# EAGLE board Quad-4layer (EAGLE 9.5.1)
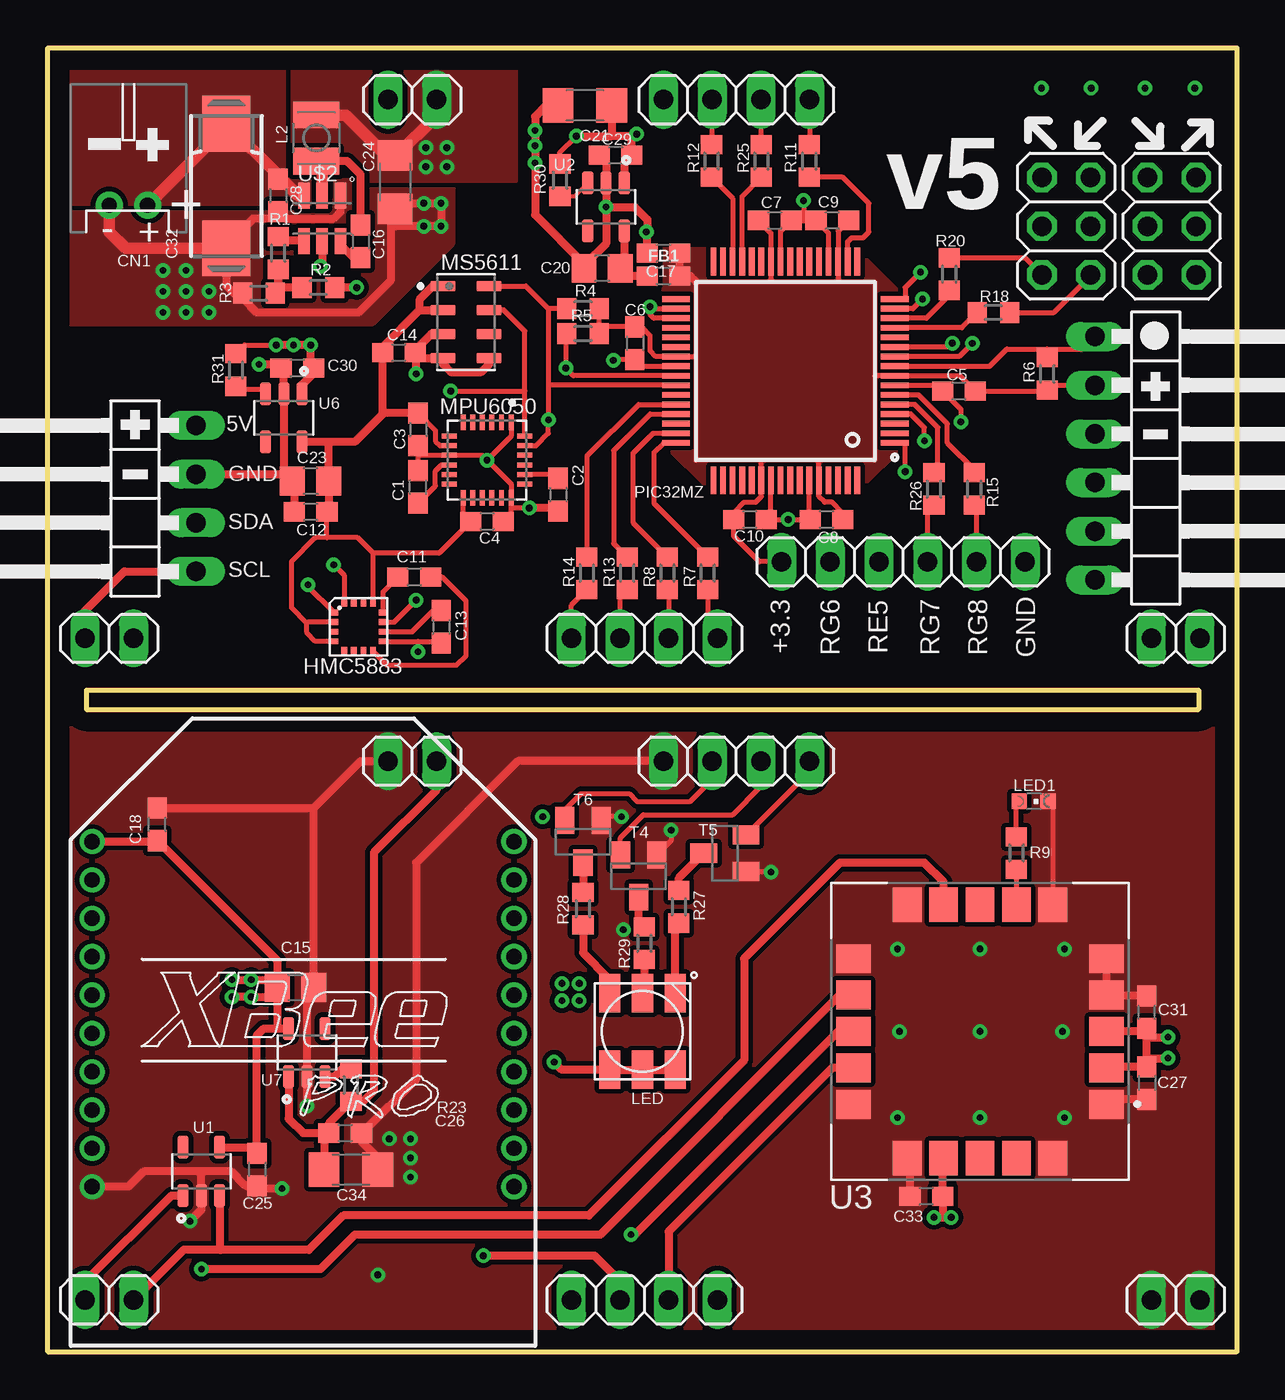
[diagram p0: board, top side]
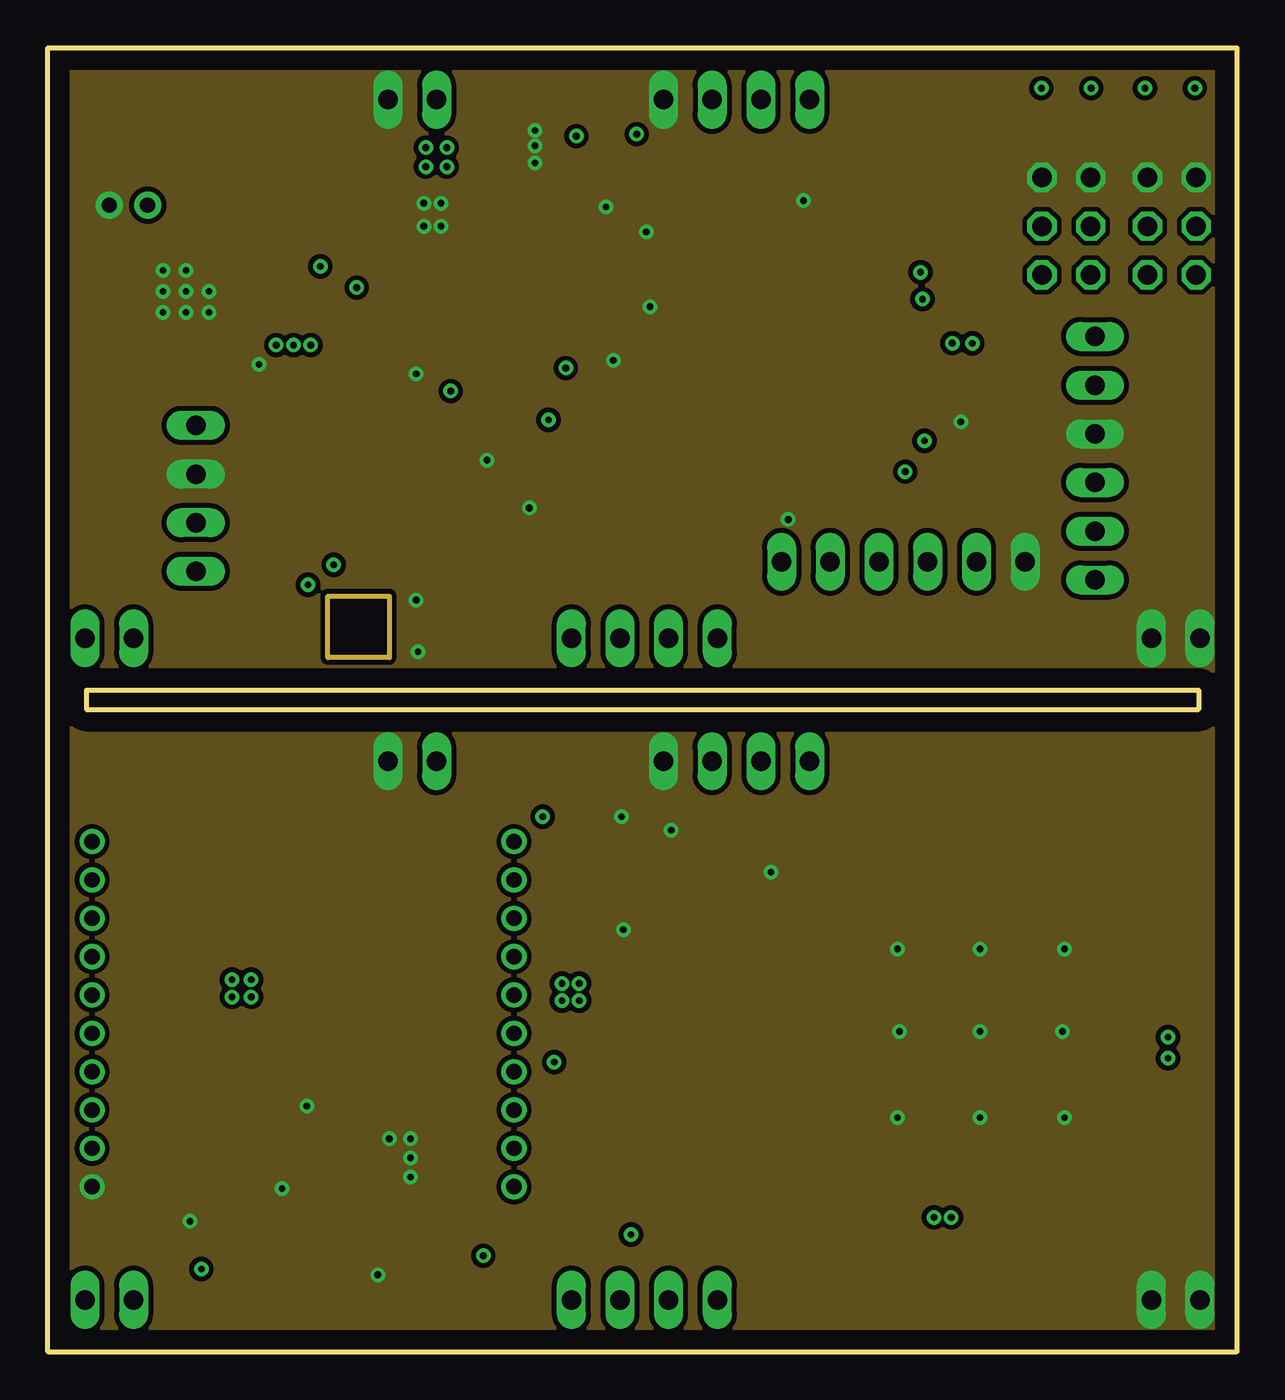
[diagram p1: board, inner layer GND]
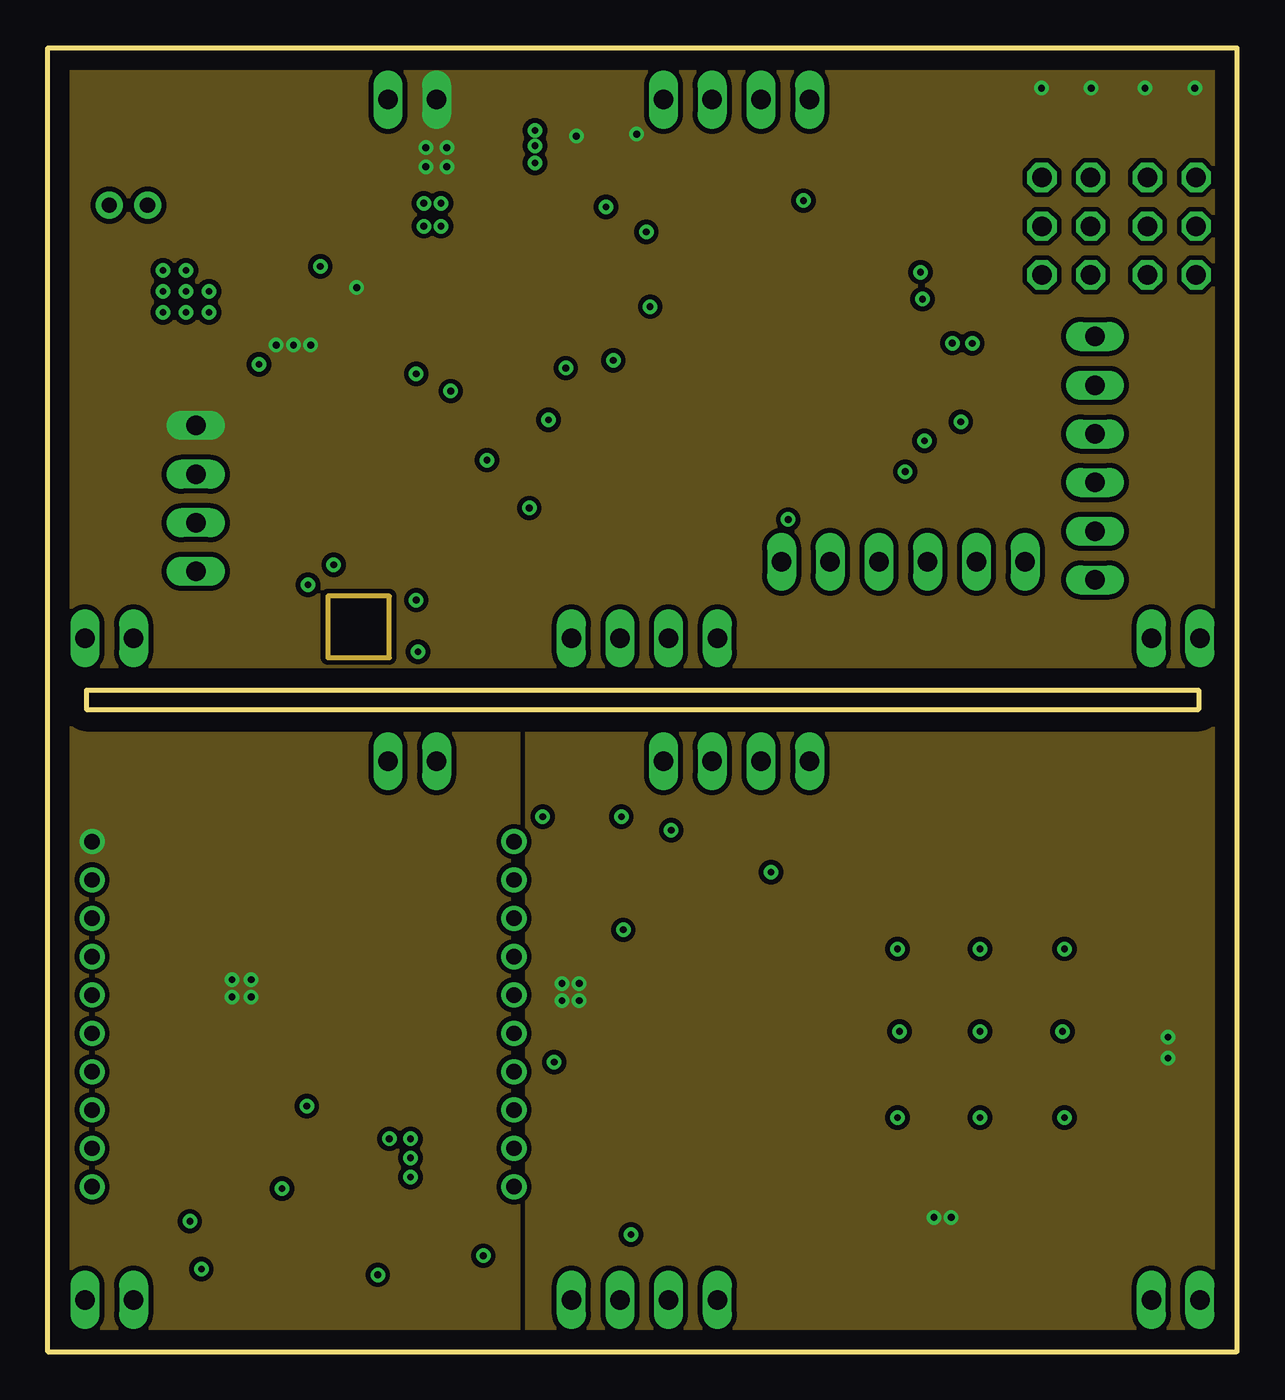
[diagram p2: board, inner layer VDD]
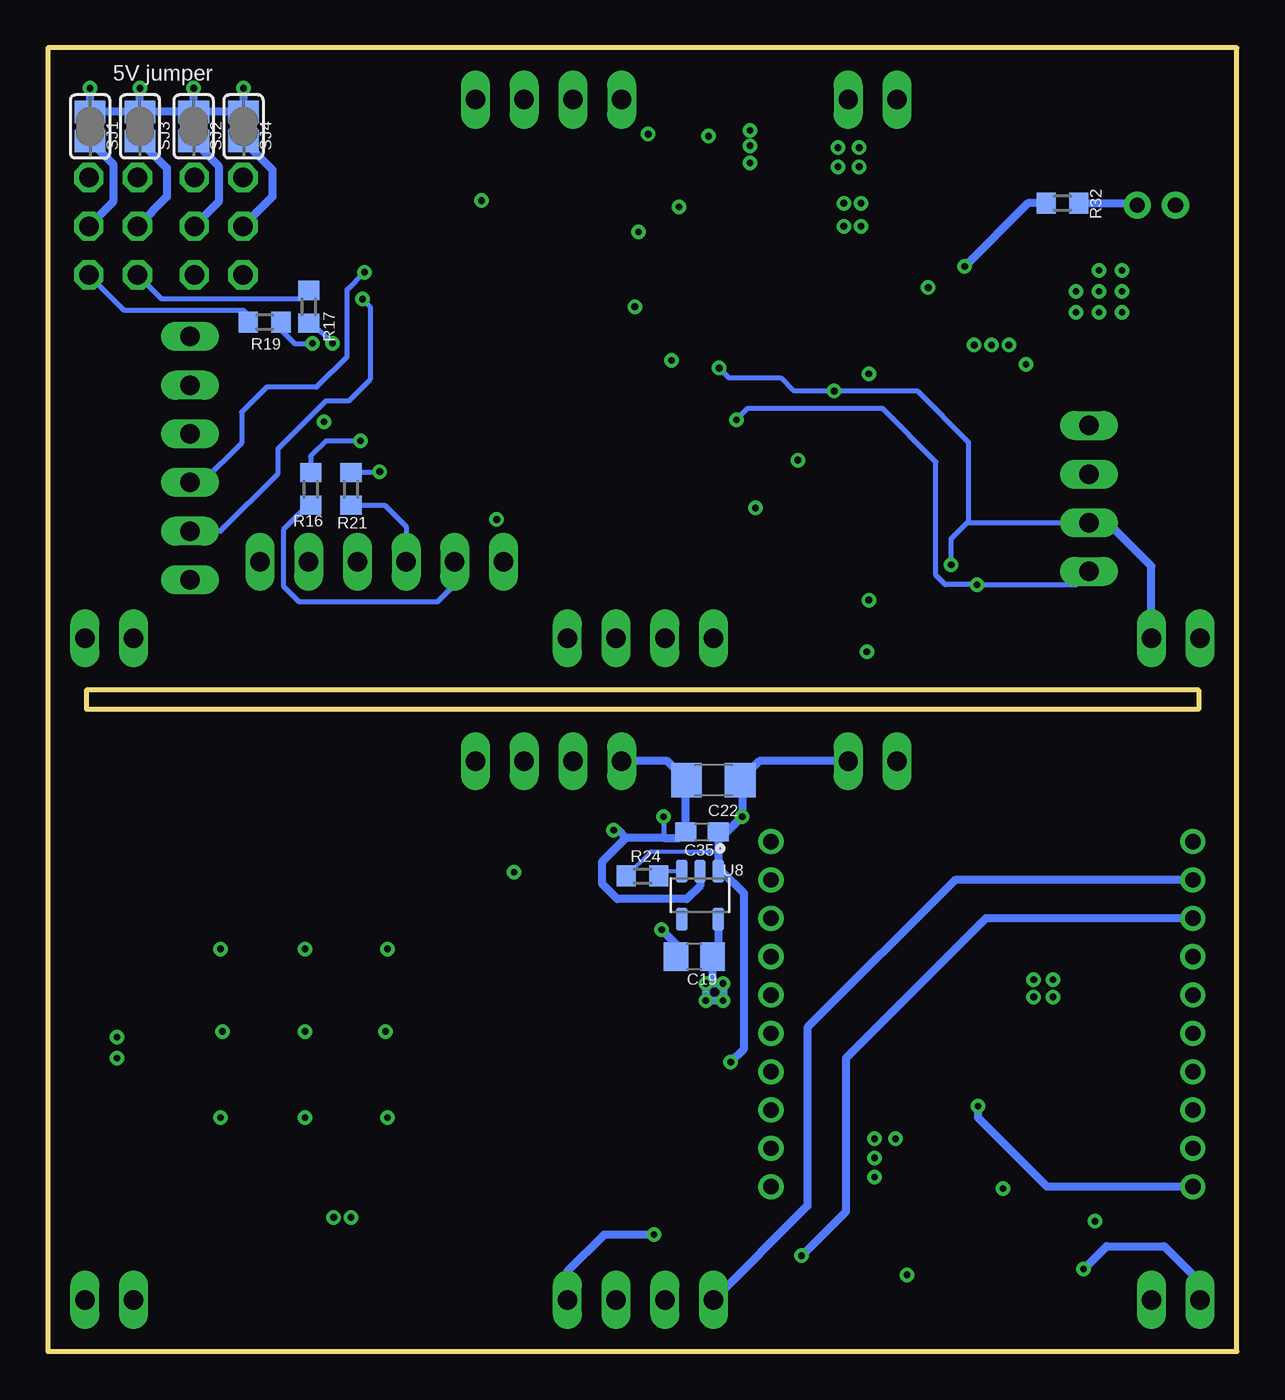
[diagram p3: board, bottom side, seen from below]

Size 62 x 68 mm. Coordinates in mm from the lower left corner, seen from the top.
Outline: 0,0 0,68 62,68 62,0 0,0
Outline: 2,34.5 60,34.5 60,33.5 2,33.5 2,34.5
Copper layers (1*2+15*16): Top 0.035mm / dielectric 0.2mm / GND 0.0175mm / dielectric 1.065mm / VDD 0.0175mm / dielectric 0.2mm / Bottom 0.035mm
Design rules "default *": minimum track width 6mil, minimum drill 0.35mm, track to track 6mil, track to pad 6mil, pad to pad 6mil, via to via 6mil, smd to smd 6mil, copper to edge 40mil, drill to drill 6mil, minimum pad ring 10mil, minimum via ring 8mil, stop-mask expansion 4mil, vias tented up to drill 0mil, thermal gap 10mil

## Footprints (pad centres in the part's own frame; a part is rotated, then mirrored left to right if it is on the bottom)
C0603 = smd 1.1 x 1: 1 -0.85,0; 2 0.85,0
C0805 = smd 1.3 x 1.5: 1 -0.95,0; 2 0.95,0
C1206 = smd 1.6 x 1.8: 1 -1.4,0; 2 1.4,0
085CS_1AR = smd 2.9 x 2.5: + 3.25,0; - -3.25,0
JST-PH-2-THM-RA = drill 0.8 pad 1.422: 1 1,0; 2 -1,0
0603 = smd 1.1 x 1: 1 -0.85,0; 2 0.85,0
LPCC-16 = smd 0.45 x 0.3: 1 -1.275,0.75; 2 -1.275,0.25; 3 -1.275,-0.25; 4 -1.275,-0.75; 9 1.275,-0.75; 10 1.275,-0.25; 11 1.275,0.25; 12 1.275,0.75 | smd 0.3 x 0.45: 5 -0.75,-1.275; 6 -0.25,-1.275; 7 0.25,-1.275; 8 0.75,-1.275; 13 0.75,1.275; 14 0.25,1.275; 15 -0.25,1.275; 16 -0.75,1.275
1X04 = drill 1.016 long: 1 -3.81,0; 2 -1.27,0; 3 1.27,0; 4 3.81,0
1X02 = drill 1.016 long: 1 -1.27,0; 2 1.27,0
1X06/90 = drill 1.016 long: 1 -6.35,-3.81; 2 -3.81,-3.81; 3 -1.27,-3.81; 4 1.27,-3.81; 5 3.81,-3.81; 6 6.35,-3.81
2X03 = drill 1.016 octagon: 1 -2.54,-1.27; 2 -2.54,1.27; 3 0,-1.27; 4 0,1.27; 5 2.54,-1.27; 6 2.54,1.27
1X06 = drill 1.016 long: 1 -6.35,0; 2 -3.81,0; 3 -1.27,0; 4 1.27,0; 5 3.81,0; 6 6.35,0
1X04/90 = drill 1.016 long: 1 -3.81,-3.81; 2 -1.27,-3.81; 3 1.27,-3.81; 4 3.81,-3.81
L2825P = smd 1.4 x 2.4: 1 -1.2,0; 2 1.2,0
RGBLED5050 = smd 2 x 1.1: 1 -2,1.7; 2 -2,0; 3 -2,-1.7; 4 2,-1.7; 5 2,0; 6 2,1.7
CHIPLED_0603 = smd 0.8 x 0.8: A 0,-0.75; C 0,0.75
QFN50P400X400X95-24N = smd 0.79 x 0.26: 1 -1.97,1.25; 2 -1.97,0.75; 3 -1.97,0.25; 4 -1.97,-0.25; 5 -1.97,-0.75; 6 -1.97,-1.25; 13 1.97,-1.25; 14 1.97,-0.75; 15 1.97,-0.25; 16 1.97,0.25; 17 1.97,0.75; 18 1.97,1.25 | smd 0.26 x 0.79: 7 -1.25,-1.97; 8 -0.75,-1.97; 9 -0.25,-1.97; 10 0.25,-1.97; 11 0.75,-1.97; 12 1.25,-1.97; 19 1.25,1.97; 20 0.75,1.97; 21 0.25,1.97; 22 -0.25,1.97; 23 -0.75,1.97; 24 -1.25,1.97
SON125P500X300X100-8N = smd 1.31 x 0.53: 1 -1.2,1.875; 2 -1.2,0.625; 3 -1.2,-0.625; 4 -1.2,-1.875; 5 1.2,-1.875; 6 1.2,-0.625; 7 1.2,0.625; 8 1.2,1.875
QFP50P1200X1200X120-64N = smd 1.45 x 0.3: 1 -5.7,3.75; 2 -5.7,3.25; 3 -5.7,2.75; 4 -5.7,2.25; 5 -5.7,1.75; 6 -5.7,1.25; 7 -5.7,0.75; 8 -5.7,0.25; 9 -5.7,-0.25; 10 -5.7,-0.75; 11 -5.7,-1.25; 12 -5.7,-1.75; 13 -5.7,-2.25; 14 -5.7,-2.75; 15 -5.7,-3.25; 16 -5.7,-3.75; 33 5.7,-3.75; 34 5.7,-3.25; 35 5.7,-2.75; 36 5.7,-2.25; 37 5.7,-1.75; 38 5.7,-1.25; 39 5.7,-0.75; 40 5.7,-0.25; 41 5.7,0.25; 42 5.7,0.75; 43 5.7,1.25; 44 5.7,1.75; 45 5.7,2.25; 46 5.7,2.75; 47 5.7,3.25; 48 5.7,3.75 | smd 0.3 x 1.45: 17 -3.75,-5.7; 18 -3.25,-5.7; 19 -2.75,-5.7; 20 -2.25,-5.7; 21 -1.75,-5.7; 22 -1.25,-5.7; 23 -0.75,-5.7; 24 -0.25,-5.7; 25 0.25,-5.7; 26 0.75,-5.7; 27 1.25,-5.7; 28 1.75,-5.7; 29 2.25,-5.7; 30 2.75,-5.7; 31 3.25,-5.7; 32 3.75,-5.7; 49 3.75,5.7; 50 3.25,5.7; 51 2.75,5.7; 52 2.25,5.7; 53 1.75,5.7; 54 1.25,5.7; 55 0.75,5.7; 56 0.25,5.7; 57 -0.25,5.7; 58 -0.75,5.7; 59 -1.25,5.7; 60 -1.75,5.7; 61 -2.25,5.7; 62 -2.75,5.7; 63 -3.25,5.7; 64 -3.75,5.7
R0603 = smd 1 x 1.1: 1 -0.85,0; 2 0.85,0
SJ = smd 1.168 x 1.6: 1 -0.762,0; 2 0.762,0
SOT23-EBC = smd 1 x 1.4: B 0.95,-1.1; C 0,1.1; E -0.95,-1.1
SOT95P280X145-5N = smd 1.21 x 0.59: 1 -1.255,0.95; 2 -1.255,0; 3 -1.255,-0.95; 4 1.255,-0.95; 5 1.255,0.95
XCVR_SAM-M8Q = smd 1.8 x 1.5: 1 -6.6,3.8; 2 -6.6,1.9; 3 -6.6,0; 4 -6.6,-1.9; 5 -6.6,-3.8; 11 6.6,-3.8; 12 6.6,-1.9; 13 6.6,0; 14 6.6,1.9; 15 6.6,3.8 | smd 1.5 x 1.8: 6 -3.8,-6.6; 7 -1.9,-6.6; 8 0,-6.6; 9 1.9,-6.6; 10 3.8,-6.6; 16 3.8,6.6; 17 1.9,6.6; 18 0,6.6; 19 -1.9,6.6; 20 -3.8,6.6
SOT95P280X140-6N = smd 1.35 x 0.6: 1 -1.185,0.95; 2 -1.185,0; 3 -1.185,-0.95; 4 1.185,-0.95; 5 1.185,0; 6 1.185,0.95
XBEE-PRO = drill 0.8 pad 1.27: 1 -11,9; 2 -11,7; 3 -11,5; 4 -11,3; 5 -11,1; 6 -11,-1; 7 -11,-3; 8 -11,-5; 9 -11,-7; 10 -11,-9; 11 11,-9; 12 11,-7; 13 11,-5; 14 11,-3; 15 11,-1; 16 11,1; 17 11,3; 18 11,5; 19 11,7; 20 11,9

## Placement (x,y rotation side)
C1  0.1uF  [C0603]  19.3,45.1 90 top
C2  2.2nF  [C0603]  26.6,44.7 270 top
C3  10nF  [C0603]  19.3,48.1 270 top
C4  0.1uF  [C0603]  22.9,43.3 0 top
C5  0.1uF  [C0603]  47.5,50.1 180 top
C6  0.1uF  [C0603]  30.6,52.6 270 top
C7  0.1uF  [C0603]  37.9,59 0 top
C8  0.1uF  [C0603]  40.6,43.4 180 top
C9  0.1uF  [C0603]  40.9,59 180 top
C10  0.1uF  [C0603]  36.6,43.4 0 top
C11  0.22uF  [C0603]  19.1,40.4 180 top
C12  0.1uF  [C0603]  13.7,43.8 180 top
C13  4.7uF  [C0603]  20.5,37.8 270 top
C14  0.1uF  [C0603]  18.3,52.1 0 top
C15  1uF  [C0805]  12.9,19 0 top
C16  0.1uF  [C0603]  16.3,57.9 270 top
C17  0.1uF  [C0603]  32.1,57.3 180 top
C18  0.1uF  [C0603]  5.7,27.5 90 top
C19  1uF  [C0805]  28.3,20.6 180 bottom
C20  1uF  [C0805]  28.9,56.5 180 top
C21  10uF  [C1206]  28,65 180 top
C22  10uF  [C1206]  27.3,29.8 180 bottom
C23  1uF  [C0805]  13.7,45.4 180 top
C24  10uF  [C1206]  18.1,61 270 top
C25  0.1uF  [C0603]  10.9,9.5 270 top
C26  0.1uF  [C0603]  15.5,11.4 0 top
C27  0.1uF  [C0603]  57.3,14 270 top
C28  0.1uF  [C0603]  12,60.3 270 top
C29  0.1uF  [C0603]  29.6,62.4 180 top
C30  0.1uF  [C0603]  13,51.3 180 top
C31  0.1uF  [C0603]  57.3,17.7 90 top
C32  [085CS_1AR]  9.3,60.8 90 top
C33  0.1uF  [C0603]  45.8,8.1 180 top
C34  10uF  [C1206]  15.8,9.5 0 top
C35  0.1uF  [C0603]  27.9,27.1 180 bottom
CN1  [JST-PH-2-THM-RA]  4.2,59.8 0 top
FB1  30Ω/1.8A  [0603]  32.1,56.1 0 top
HMC5883  HMC5883L  [LPCC-16]  16.2,37.8 0 top
JP1  [1X04]  31.1,2.7 0 top
JP2  [1X02]  3.2,37.2 180 top
JP3  [1X06/90]  58.4,46.6 270 top
JP4  [2X03]  53.1,58.7 90 top
JP5  [2X03]  58.6,58.7 90 top
JP8  [1X04]  35.9,30.8 180 top
JP9  [1X04]  35.9,65.3 180 top
JP10  [1X02]  19,65.3 180 top
JP11  [1X04]  31.1,37.2 0 top
JP12  [1X02]  3.2,2.7 180 top
JP13  [1X02]  19,30.8 180 top
JP14  [1X02]  58.8,2.7 0 top
JP15  [1X02]  58.8,37.2 0 top
JP16  [1X06]  44.6,41.2 180 top
JP17  [1X04/90]  3.9,44.5 90 top
L2  4.7uH  [L2825P]  14,63.3 270 top
LED  RGBLED5050  [RGBLED5050]  31,16.7 90 top
LED1  [CHIPLED_0603]  51.4,28.7 270 top
MPU6050  MPU-6050  [QFN50P400X400X95-24N]  22.9,46.5 270 top
MS5611  MS561101BA03-50  [SON125P500X300X100-8N]  21.8,53.7 0 top
PIC32MZ  PIC32MZ2048EFH064-I/PT  [QFP50P1200X1200X120-64N]  38.45,51.15 180 top
R1  75k  [R0603]  12,57.3 270 top
R2  41k  [R0603]  14.1,55.5 0 top
R3  7.6k  [R0603]  11,55.2 0 top
R4  4.7k  [R0603]  27.9,54.4 0 top
R5  4.7k  [R0603]  27.9,53.1 0 top
R6  1k  [R0603]  52.1,51 270 top
R7  33  [R0603]  34.4,40.6 90 top
R8  33  [R0603]  32.3,40.6 90 top
R9  1k  [R0603]  50.5,26 270 top
R11  33  [R0603]  39.7,62.1 90 top
R12  33  [R0603]  34.6,62.1 90 top
R13  33  [R0603]  30.2,40.6 90 top
R14  33  [R0603]  28.1,40.6 90 top
R15  33  [R0603]  48.3,45 270 top
R16  33  [R0603]  48.3,45 270 bottom
R17  33  [R0603]  48.4,54.5 90 bottom
R18  33  [R0603]  49.3,54.2 0 top
R19  33  [R0603]  50.7,53.7 180 bottom
R20  33  [R0603]  47,56.2 90 top
R21  33  [R0603]  46.2,45 270 bottom
R23  10k  [R0603]  15.8,13.9 270 top
R24  10k  [R0603]  31,24.8 180 bottom
R25  33  [R0603]  37.2,62.1 90 top
R26  33  [R0603]  46.2,45 270 top
R27  330  [R0603]  32.9,23.2 270 top
R28  330  [R0603]  27.9,23.1 270 top
R29  220  [R0603]  31.1,21.3 270 top
R30  10k  [R0603]  26.7,61.1 90 top
R31  10k  [R0603]  9.8,51.2 90 top
R32  10k  [R0603]  9.1,59.9 0 bottom
SJ1  [SJ]  59.8,63.9 90 bottom
SJ2  [SJ]  54.4,63.9 90 bottom
SJ3  [SJ]  57.2,63.9 90 bottom
SJ4  [SJ]  51.8,63.9 90 bottom
T4  [SOT23-EBC]  30.8,24.8 180 top
T5  [SOT23-EBC]  35.3,26 90 top
T6  [SOT23-EBC]  27.9,26.6 180 top
U1  CAT24C02  [SOT95P280X145-5N]  8,9.4 90 top
U2  TLV75533PDBVR  [SOT95P280X145-5N]  29.1,59.7 270 top
U3  SAM-M8Q  [XCVR_SAM-M8Q]  48.6,16.7 180 top
U6  TLV75533PDBVR  [SOT95P280X145-5N]  12.3,48.7 270 top
U7  TLV75533PDBVR  [SOT95P280X145-5N]  13.5,15.6 90 top
U8  TLV75533PDBVR  [SOT95P280X145-5N]  28,23.8 270 bottom
U$2  AP65211A  [SOT95P280X140-6N]  14.3,59.1 270 top
XB2  XBEE-PRO  [XBEE-PRO]  13.3,17.6 0 top

## Library data of the parts
C1-C35 = rcl; SPICEPREFIX: C
CN1 LED LED1 = adafruit
FB1 = SparkFun-Coils; PROD_ID: NDUC-07859
HMC5883 = HMC5883L; AVAILABILITY: Unavailable; DESCRIPTION: Digital Compass +/- 0.8g, Lcc-16; MF: Honeywell Aerospace; MP: HMC5883L-T; PACKAGE: LCC-16 Honeywell; PRICE: None
JP1-JP5 JP8-JP17 = pinhead
L2 = rcl; SPICEPREFIX: L
MPU6050 = MPU-6050; AVAILABILITY: Unavailable; DESCRIPTION: 3-axis gyroscope, 3-axis accelerometer in a 4x4x0.9 housing; MF: TDK InvenSense; MP: MPU-6050; PACKAGE: QFN-24 InvenSense; PRICE: None
MS5611 = MS561101BA03-50; AVAILABILITY: Unavailable; DESCRIPTION: Pressure Sensor 1.44V to 3.6V 0.01bar to 1.2bar Absolute 8-Pin QFN T/R; MF: TE Connectivity; MP: MS561101BA03-50; PACKAGE: SMD-8 Measurement Specialties; PRICE: None
PIC32MZ = PIC32MZ2048EFH064-I_PT; DESCRIPTION: PIC32MZ Series 2 MB Flash 512 kB RAM 200 MHz 32-Bit Microcontroller - TQFP-64; DIGI-KEY_PART_NUMBER: PIC32MZ2048EFH064-I/PT-ND; DIGI-KEY_PURCHASE_URL: https://www.digikey.com/product-detail/en/microchip-technology/PIC32MZ2048EFH064-I-PT/PIC32MZ2048EFH064-I-PT-ND/5323563?utm_source=snapeda&utm_medium=aggregator&utm_campaign=symbol; MF: Microchip; MP: PIC32MZ2048EFH064-I/PT; PACKAGE: TQFP-64 Microchip
R1-R9 R11-R21 R23-R32 = rcl; SPICEPREFIX: R
SJ1-SJ4 = jumper
T4-T6 = transistor
U1 = CAT24C02; AVAILABILITY: Unavailable; DESCRIPTION: 500mA Low-IQ Small-Size Low-Dropout _LDO_ Regulator 5-SOT-23 -40 to 125; MF: Texas Instruments; MP: TLV75533PDBVR; PACKAGE: SOT-23 Texas Instruments; PRICE: None
U2 U6-U8 = TLV75533PDBVR; AVAILABILITY: Unavailable; DESCRIPTION: 500mA Low-IQ Small-Size Low-Dropout _LDO_ Regulator 5-SOT-23 -40 to 125; MF: Texas Instruments; MP: TLV75533PDBVR; PACKAGE: SOT-23 Texas Instruments; PRICE: None
U3 = SAM-M8Q; AVAILABILITY: Unavailable; DESCRIPTION: u-Blox M8 Gnss Antenna Module; MF: U-Blox America; MP: SAM-M8Q; PACKAGE: SMD-20 U-Blox America; PRICE: None
U$2 = SOT95P280X140-6N
XB2 = maxstream; MPN: XBP24-AWI-001; OC_FARNELL: 1337916; OC_NEWARK: 42M2667

## Nets
+3V3: C5.1 C6.1 C7.1 C8.1 C9.1 C10.1 C17.1 FB1.2 JP3.2 JP16.6 PIC32MZ.8 PIC32MZ.19 PIC32MZ.26 PIC32MZ.39 PIC32MZ.54 PIC32MZ.60 R4.2 R5.2 R6.2
+5V: C21.1 C24.1 C29.1 C30.1 JP10.1 JP17.4 L2.1 R2.2 R30.2 R31.2 SJ1.2 SJ2.2 SJ3.2 SJ4.2 U2.1 U6.1
+5V/1: C22.1 C26.1 C34.1 C35.1 JP13.1 LED.1 LED.2 LED.3 R23.2 R24.2 U7.1 U8.1
+12V: C28.1 C32.+ CN1.1 R32.2 U$2.3
DGND: C15.2 C18.2 C19.2 C22.2 C25.2 C26.2 C27.2 C31.2 C33.2 C34.2 C35.2 JP8.4 JP13.2 JP14.1 JP14.2 LED1.C T4.E T5.E T6.E U1.2 U3.1 U3.4 U3.5 U3.6 U3.10 U3.11 U3.15 U3.16 U3.20 U7.2 U8.2 XB2.10
ESC_1: JP5.1 R19.2
ESC_2: JP5.2 R17.2
ESC_3: JP4.1 R18.2
ESC_4: JP4.2 R20.2
GND: C1.2 C2.2 C3.2 C4.2 C5.2 C6.2 C7.2 C8.2 C9.2 C10.2 C12.2 C13.2 C14.2 C17.2 C20.2 C21.2 C23.2 C24.2 C28.2 C29.2 C30.2 C32.- CN1.2 HMC5883.9 HMC5883.11 JP3.3 JP4.5 JP4.6 JP5.5 JP5.6 JP9.4 JP10.2 JP15.1 JP15.2 JP16.1 JP17.3 MPU6050.1 MPU6050.9 MPU6050.18 MS5611.3 MS5611.4 MS5611.5 PIC32MZ.7 PIC32MZ.20 PIC32MZ.25 PIC32MZ.34 PIC32MZ.35 PIC32MZ.40 PIC32MZ.55 PIC32MZ.59 R3.1 U2.2 U6.2 U$2.1
GPIO1: JP16.5 R16.2
GPIO2: JP16.4 R21.2
GPIO3: JP16.3 R26.2
GPIO4: JP16.2 R15.2
GPS_RX: JP11.1 R14.1
GPS_RX_J: JP1.3 U3.14
GPS_TX: JP11.2 R13.1
GPS_TX_J: JP1.4 U3.13
LED_BLUE: JP9.1 R11.2
LED_BLUE1: JP8.1 T5.B
LED_GREEN: JP9.3 R12.2
LED_GREEN1: JP8.2 T4.B
LED_RED: JP9.2 R25.2
MCLR: JP3.1 PIC32MZ.9 R6.1
N$1: C1.1 MPU6050.10
N$2: C2.1 MPU6050.20
N$3: C11.1 HMC5883.8
N$4: C11.2 HMC5883.12
N$5: LED.5 R29.2
N$6: C13.1 HMC5883.10
N$7: LED.6 R28.2
N$8: C16.1 L2.2 U$2.2
N$9: C16.2 U$2.6
N$10: R1.1 U$2.4
N$11: R1.2 R2.1 R3.2
N$12: PIC32MZ.48 R7.2
N$13: PIC32MZ.47 R8.2
N$14: R9.2 U3.7
N$15: LED.4 R27.2
N$16: LED1.A R9.1
N$17: PIC32MZ.18 R11.1
N$18: PIC32MZ.45 R13.2
N$19: PIC32MZ.44 R14.2
N$20: PIC32MZ.29 R25.1
N$21: PIC32MZ.4 R16.1
N$22: PIC32MZ.1 R21.1
N$23: PIC32MZ.11 R17.1
N$24: PIC32MZ.13 R18.1
N$25: PIC32MZ.10 R19.1
N$26: PIC32MZ.14 R20.1
N$27: R23.1 U7.3
N$28: R24.1 U8.3
N$29: JP4.4 SJ4.1
N$30: PIC32MZ.5 R26.1
N$31: PIC32MZ.6 R15.1
N$32: R31.1 U6.3
N$33: R30.1 U2.3
N$34: PIC32MZ.30 R12.1
N$35: JP8.3 T6.B
N$36: R32.1 U$2.5
N$39: C20.1 FB1.1 U2.5
N$40: JP5.3 SJ1.1
N$41: JP4.3 SJ2.1
N$42: R28.1 T6.C
N$43: R29.1 T4.C
N$44: R27.1 T5.C
N$45: JP5.4 SJ3.1
PGC: JP3.5 PIC32MZ.15
PGD: JP3.4 PIC32MZ.16
SCL: HMC5883.1 JP2.2 JP17.1 MPU6050.23 MS5611.8 PIC32MZ.42 R4.1
SCL_J: JP12.2 U1.1 U3.12
SDA: HMC5883.16 JP2.1 JP17.2 MPU6050.24 MS5611.7 PIC32MZ.41 R5.1
SDA_J: JP12.1 U1.3 U3.9
V+: C15.1 C18.1 C25.1 U1.4 U7.5 XB2.1
VBUS: PIC32MZ.33
VCC: C3.1 C4.1 C12.1 C14.1 C23.1 HMC5883.2 HMC5883.4 HMC5883.13 MPU6050.8 MPU6050.13 MS5611.1 MS5611.2 U6.5
VDD: C19.1 C27.1 C31.1 C33.1 U3.2 U3.3 U3.17 U8.5
XBEE_RX: JP11.3 R8.1
XBEE_RX_J: JP1.2 XB2.3
XBEE_TX: JP11.4 R7.1
XBEE_TX_J: JP1.1 XB2.2

## Tracks (layer width: path | path; a pad name or v marks a point on that pad's centre or on a via)
+3V3
  Top 0.254: 41.75,59.35 C9.1 41.2,58.45 PIC32MZ.19 41.2,55.8 | 37.05,59.25 C7.1 37.7,58.35 PIC32MZ.26 37.7,55.8 | 30.75,53.45 C6.1 | C8.1 41.45,43.75 40.9,44.3 40.5,44.3 40.2,44.6 PIC32MZ.60 40.2,46.5 | JP16.6 37.1,41.2 35.75,42.55 C10.1 35.75,43.75 36.3,44.3 36.9,44.3 37.2,44.6 PIC32MZ.54 37.2,46.5 | C6.1 30.95,53.45 31.4,53 31.4,52.2 31.7,51.9 PIC32MZ.39 33.8,51.9 | 37.7,55.8 41.2,55.8 | 41.2,55.8 43.1,55.8 43.1,50.9 | 43.1,50.9 43.1,46.5 40.2,46.5 | 40.2,46.5 37.2,46.5 | 37.2,46.5 33.8,46.5 33.8,51.9 | 33.8,51.9 33.8,55.8 37.7,55.8 | 43.1,50.9 PIC32MZ.8 47.55,50.9 C5.1 52.05,50.1 R6.2 52.36,50.41 JP3.2 | C6.1 29.1,53.45 R5.2 R4.2
  Top 0.406: 33.8,55.8 33.5,56.1 FB1.2 C17.1
  pour Top (isolate 0.254, no thermals): 32.1,47.4 32.1,57.5 42.1,57.5 44.7,54.9 44.7,47.4 42.2,44.9 34.6,44.9
+5V  (via drill 0.35)
  Top 0.254: R30.2 26.7,62.55 v27.55,63.4 | R31.2 10.25,52.5 v11.9,52.5
  Top 0.406: U2.1 30.05,62 C29.1 30.45,63.35 30.4,63.4 | v27.55,63.4 29.4,63.4 | v16.1,55.5 R2.2 | 29.4,63.4 29.43,63.42 29.4,63.45 C21.1 | v30.7,63.5 30.6,63.4 30.4,63.4 | 30.4,63.4 29.4,63.4 | v11.9,52.5 v12.8,52.5 v13.7,52.5 13.7,51.45 C30.1 13.85,51.05 13.25,50.45 U6.1
  Top 0.61: L2.1 15.53,64.5 17.62,62.4 C24.1 18.2,62.4 20.27,64.47 JP10.1
  Bottom 0.406: SJ2.2 SJ4.2 v51.8,65.9 | SJ2.2 SJ3.2 | SJ3.2 SJ1.2 v59.8,65.9 | SJ2.2 v54.4,65.9 | SJ3.2 v57.2,65.9
  other vias: 19.7,62.8 20.8,62.8 19.7,61.8 20.8,61.8
  pour VDD (isolate 0.254, rank 2, no thermals): 0,34.5 0,68 62,68 62,34.5
  pour Top (isolate 0.254, rank 2, no thermals): 12.3,68 12.3,61.1 24.4,61.1 24.4,68
+5V/1  (via drill 0.35)
  Top 0.254: C34.1 14.18,9.73
  Top 0.406: JP13.1 20.27,29.3 17,26.03 17,13.6 16.45,13.05 R23.2 | 15.8,12.93 R23.2 | LED.3 LED.2 LED.1 26.8,14.7 v26.4,15.1 | U7.1 12.55,12.15 13.3,11.4 C26.1 | R23.2 14.65,11.9 C26.1 | C26.1 14.4,11.15 C34.1
  Bottom 0.203: R24.2 30.55,26.1 27.05,26.1
  Bottom 0.406: 31.85,25.15 R24.2 | v25.8,27.9 25.77,27.9 | v26.4,15.1 25.7,15.8 25.7,23.9 26.86,25.05 U8.1 27.05,26.1 27.05,26.65 26.75,26.95 | v25.8,27.9 26.75,26.95 | JP13.1 24.9,30.8 C22.1 25.8,29.7 v25.8,27.9 | C35.1 26.9,26.95 26.75,26.95
+12V
  Top 0.61: U$2.3 13.05,60.28 12.19,61.15 C28.1 12,61.35 C32.+ 9.3,63.9 CN1.1
  Bottom 0.406: R32.2 5.3,59.9 CN1.1
  pour Top (isolate 0.254, no thermals): 0,68 0,59.9 13.7,59.9 13.7,61.1 12.3,61.1 12.3,68
DGND  (via drill 0.35)
  Top 0.254: 36.95,25.05 T5.E 37.65,25.05 v37.7,25 | 32.09,30.11 JP8.4 | T6.E 29.05,27.9 v29.9,27.9 | v32.5,27.2 32.5,26.65 T4.E | LED1.C 52.4,28.45 U3.6
  Top 0.406: v13.5,12.8 U7.2 13.5,18.65 C15.2 13.85,28.35 | JP8.4 24.5,30.8 19.2,25.5 19.2,14.2 16.4,11.4 C26.2 16.35,10.95 17.2,10.1 C34.2 | v12.2,8.5 11.05,8.5 C25.2 10.3,8.65 9.55,9.4 8,9.4 | T5.E 36.1,25.05 | C18.2 13.85,28.35 | 8,9.4 U1.2 8,7.4 v7.4,6.8 | 8,9.4 5,9.4 4.2,8.6 XB2.10 | C33.2 44.95,9.95 U3.16 | C27.2 55.45,13.15 U3.1 | C31.2 55.25,18.55 U3.4 U3.5 | 13.85,28.35 16.3,30.8 JP13.2
  Bottom 0.254: v29.9,27.9 29.9,26.8
  Bottom 0.406: v13.5,12.8 13.5,12.2 9.9,8.6 XB2.10 | U8.2 28,24.3 28.7,23.6 32.3,23.6 33.1,24.4 33.1,25.56 31.86,26.8 | v30,22 29.1,21.1 29.25,21.1 C19.2 | 12.1,8.6 v12.2,8.5 | 31.86,26.8 29.9,26.8 29.05,26.8 C35.2 | JP8.4 29.7,30.8 C22.2 28.75,29.75 C35.2 | 29.05,27.25 28.9,27.25 C35.2 | v32.5,27.2 32.26,27.2 31.86,26.8
  other vias: 44.4,16.7 44.3,21 48.6,21 53,21 52.9,16.7 48.6,12.2 44.3,12.2 53,12.2 48.6,16.7 17.2,4 17.8,11.1 18.9,11.1 18.9,10.1 18.9,9.1
  pour GND (isolate 0.254, no thermals): 0,33.5 0,0 62,0 62,33.5
  pour Top (isolate 0.254, no thermals): 0,33.5 0,0 62,0 62,33.5
ESC_1
  Bottom 0.254: R19.2 51.38,53.88 51.8,54.3 58.01,54.3 JP5.1
ESC_2
  Bottom 0.254: JP5.2 56.07,54.9 48.85,54.9 R17.2
ESC_3
  Top 0.254: R18.2 52.45,54.2 54.37,56.12 JP4.1
ESC_4
  Top 0.254: R20.2 50.94,57.05 JP4.2
GND  (via drill 0.35)
  Top 0.254: HMC5883.9 19.3,37.05 | 19.3,37.05 20.4,37.05 C13.2 | HMC5883.11 18.05,38.05 v19.2,39.2 | v19.3,36.5 19.3,37.05 | v22.9,46.5 22.65,46.75 MPU6050.9 19.3,46.75 | MPU6050.1 24.15,47.75 v22.9,46.5 | v22.9,46.5 24.15,45.25 MPU6050.18 24.15,44 | C4.2 24.15,43.7 24.15,44 | C1.2 19.3,46.75 | 19.35,47.15 19.35,47.2 C3.2 19.3,46.75 | C10.2 37.65,43.6 | C10.2 v38.6,43.4 C8.2 | C8.2 39.65,43.5 | v25.1,44 24.15,44 | 39.4,59 C7.2 38.2,58.45 PIC32MZ.25 | 39.4,59 C9.2 40.7,58.35 PIC32MZ.20 | v39.4,60.04 39.4,59 | v29.48,51.7 29.53,51.75 C6.2 30.95,51.4 PIC32MZ.40 | PIC32MZ.34 31.5,54.4 v31.4,54.5 31.4,54.1 31.6,53.9 PIC32MZ.35 | C10.2 37.7,43.65 PIC32MZ.55 | C8.2 39.7,43.45 PIC32MZ.59 | PIC32MZ.7 46.35,50.4 C5.2 47.6,49.15 v47.6,48.5
  Top 0.406: C23.2 12.75,45.85 | C29.2 29.1,62.05 U2.2 v29.1,59.7 | C2.2 26.45,44 v25.1,44 | U$2.1 15.25,59.45 14.9,59.1 12.35,59.1 C28.2 11.65,59.1 10.7,59.1 9.3,57.7 C32.- 9.3,55.6 9.93,54.98 R3.1 10.15,54.95 10.9,54.2 16.2,54.2 17.9,55.9 17.9,59.2 18.1,59.2 | C20.2 28.2,56.5 28,56.7 | 28,56.7 25.4,59.3 v25.4,62 v25.4,62.9 v25.4,63.7 25.4,64.42 25.98,65 C21.2 | v29.1,59.7 29.1,57.8 28,56.7 | v11,51.5 11.95,51.5 C30.2 12.3,51.15 U6.2 12.3,45.4 | 19.27,51.98 C14.2 19.15,52.25 19.98,53.08 MS5611.3 | 19.27,51.98 19.43,51.83 MS5611.4 20.6,51.5 21,51.1 22.6,51.1 23,51.5 MS5611.5 | v19.2,51 19.2,51.9 19.27,51.98 | C17.2 31.25,58.35 | 31.25,58.35 v31.2,58.4 | v29.1,59.7 30.6,59.7 31.25,59.05 31.25,58.35 | 18.1,59.2 18.1,58.7 v19.6,58.7 v20.5,58.7 v20.5,59.9 v19.6,59.9 18.4,59.9 C24.2 18.1,59.2 | C23.2 12.85,45.3 C12.2 | C23.2 12.35,45.8 | JP17.3 12.38,45.77 C23.2
  Top 0.61: CN1.2 3.2,58.4 4.05,57.55 C32.-
  other vias: 6,56.4 7.2,56.4 6,55.3 7.2,55.3 8.4,55.3 6,54.2 7.2,54.2 8.4,54.2
  pour GND (isolate 0.254, rank 2, no thermals): 0,34.5 62,34.5 62,68 0,68
  pour Top (isolate 0.254, rank 3, no thermals): 0,61.1 21.1,61.1 21.1,57.8 16.9,53.6 0,53.6
GPIO1
  Bottom 0.254: JP16.5 40.79,40.01 41.7,39.1 48.9,39.1 49.7,39.9 49.7,42.9 48.45,44.15 R16.2
GPIO2
  Bottom 0.254: R21.2 44.45,44.15 43.33,43.03 JP16.4
GPIO3
  Top 0.254: JP16.3 45.87,43.82 R26.2
GPIO4
  Top 0.254: R15.2 48.41,44.04 JP16.2
GPS_RX
  Top 0.254: R14.1 27.29,38.94 JP11.1
GPS_RX_J
  Top 0.406: U3.14 40.9,14.8 32.37,6.27 JP1.3
GPS_TX
  Top 0.254: JP11.2 29.83,39.75 R13.1
GPS_TX_J  (via drill 0.35)
  Top 0.406: U3.13 41.2,16.7 30.6,6.1 v30.4,6.1
  Bottom 0.406: JP1.4 34.91,4.19 33,6.1 v30.4,6.1
LED_BLUE
  Top 0.254: JP9.1 R11.2
LED_BLUE1
  Top 0.254: T5.B 39.71,30.26 JP8.1
LED_GREEN
  Top 0.254: R12.2 34.63,62.98 JP9.3
LED_GREEN1
  Top 0.254: JP8.2 37.17,29.47 35.7,28 31.05,28 29.85,26.8 T4.B
LED_RED
  Top 0.254: R25.2 37.2,65.27 JP9.2
MCLR
  Top 0.254: PIC32MZ.9 49.1,51.4 50,52.3 52.1,52.3 | JP3.1 53.94,52.3 52.1,52.3 | R6.1 52.1,52.3
N$1
  Top 0.254: C1.1 20.2,45.15 20.2,45.94 20.51,46.25 MPU6050.10
N$2
  Top 0.254: C2.1 26.57,45.75 MPU6050.20
N$3
  Top 0.254: HMC5883.8 17.68,35.8 21.3,35.8 21.8,36.3 21.8,39.15 20.55,40.4 C11.1
N$4
  Top 0.254: C11.2 17.48,39.62 HMC5883.12
N$5
  Top 0.406: 30.85,18.85 LED.5 31.1,18.8 R29.2
N$6
  Top 0.254: HMC5883.10 19,37.55 20.2,38.75 20.4,38.75 C13.1
N$7
  Top 0.406: R28.2 27.9,20.8 29.3,19.4 LED.6
N$8
  Top 0.406: C16.1 16.3,61.4 15.6,62.1 L2.2
  Top 0.61: L2.2 14.3,61.8 U$2.2
N$9
  Top 0.406: C16.2 15.95,57.05 15.25,57.75 U$2.6
N$10
  Top 0.406: U$2.4 13.31,57.95 12.2,57.95 R1.1
N$11
  Top 0.406: R3.2 12,55.35 R1.2 12,55.5 R2.1
N$12
  Top 0.254: R7.2 34.1,41.75 | R7.2 34.5,41.55 | R7.2 31.6,44.25 31.6,46.9 32.1,47.4 PIC32MZ.48
N$13
  Top 0.254: R8.2 30.5,43.25 30.5,46.85 31.55,47.9 PIC32MZ.47
N$14
  Top 0.254: R9.2 U3.7
N$15
  Top 0.406: 32.9,18.9 LED.4 32.7,22.15 R27.2
N$16
  Top 0.254: 50.6,26.75 R9.1 50.5,28.55 LED1.A
N$17
  Top 0.254: PIC32MZ.18 41.7,57.9 41.9,58.1 42.5,58.1 42.8,58.4 42.8,59.9 41.45,61.25 R11.1
N$18
  Top 0.254: R13.2 29.5,42.15 29.5,47 31.4,48.9 PIC32MZ.45
N$19
  Top 0.254: R14.2 28.1,46.7 30.8,49.4 PIC32MZ.44
N$20
  Top 0.254: PIC32MZ.29 36.2,60.25 R25.1
N$21  (via drill 0.35)
  Top 0.254: v45.7,47.5 45.7,48.2 45,48.9 PIC32MZ.4
  Bottom 0.254: v45.7,47.5 47.5,47.5 48.3,46.7 R16.1
N$22  (via drill 0.35)
  Top 0.254: v44.7,45.9 44.7,47.4 PIC32MZ.1
  Bottom 0.254: v44.7,45.9 44.75,45.85 R21.1
N$23  (via drill 0.35)
  Top 0.254: v47.16,52.6 46.96,52.4 PIC32MZ.11
  Bottom 0.254: R17.1 48.21,53.65 v47.16,52.6
N$24
  Top 0.254: R18.1 48.35,54.1 | 48.28,54.03 R18.1 | R18.1 47.65,53.4 PIC32MZ.13
N$25  (via drill 0.35)
  Top 0.254: v48.2,52.59 47.51,51.9 PIC32MZ.10
  Bottom 0.254: R19.1 49.85,53.3 49.14,52.59 v48.2,52.59
N$26
  Top 0.254: R20.1 47,55.1 45.8,53.9 PIC32MZ.14
N$27
  Top 0.406: U7.3 14.95,14.34 15.35,14.75 R23.1
N$28
  Bottom 0.203: U8.3 29.89,25.05
  Bottom 0.406: 29.89,25.05 R24.1
N$29
  Bottom 0.406: SJ4.1 50.3,61.64 50.3,60.23 JP4.4
N$30
  Top 0.254: R26.1 46.4,46.05 46.4,48.2 45.2,49.4 PIC32MZ.5
N$31
  Top 0.254: R15.1 48.3,46 46.9,47.4 46.9,48.4 45.4,49.9 PIC32MZ.6
N$32
  Top 0.254: R31.1 9.95,50.2 11.11,50.2 U6.3
N$33
  Top 0.203: U2.3 27.45,60.25 R30.1
N$34
  Top 0.254: R12.1 35.7,60.15 PIC32MZ.30
N$35
  Top 0.254: JP8.3 34.63,29.83 33.5,28.7 30.7,28.7 30.3,29.1 27.8,29.1 26.95,28.25 T6.B
N$36  (via drill 0.35)
  Top 0.406: U$2.5 14.3,56.7 v14.2,56.6
  Bottom 0.406: R32.1 10.9,59.9 v14.2,56.6
N$37
  GND 0.254: 14.6,36.2 14.6,39.4 17.8,39.4 17.8,36.2 14.6,36.2
N$38
  VDD 0.254: 14.6,39.4 14.6,36.2 17.8,36.2 17.8,39.4 14.6,39.4
N$39
  Top 0.406: U2.5 30.05,56.7 C20.1 30.25,56.1 FB1.1 30.95,56.1
N$40
  Bottom 0.406: SJ1.1 58.6,61.94 58.6,59.97 JP5.3
N$41
  Bottom 0.406: SJ2.1 53.1,61.84 53.1,59.97 JP4.3
N$42
  Top 0.254: 27.8,25.4 T6.C
  Top 0.406: T6.C R28.1
N$43
  Top 0.406: R29.1 30.8,22.45 T4.C
N$44
  Top 0.406: 32.8,24.15 R27.1 32.9,24.7 T5.C
N$45
  Bottom 0.406: SJ3.1 55.8,61.74 55.8,60.23 JP5.4
PGC  (via drill 0.35)
  Top 0.254: v45.6,54.9 45.1,54.4 PIC32MZ.15
  Bottom 0.254: v45.6,54.9 45.2,54.5 45.2,50.7 46.3,49.6 47.5,49.6 50,47.1 50,45.8 53.01,42.79 JP3.5
PGD  (via drill 0.35)
  Top 0.254: PIC32MZ.16 44.7,54.9 44.7,55.5 v45.5,56.3
  Bottom 0.254: v45.5,56.3 46.4,55.4 46.4,51.9 48,50.3 50.6,50.3 51.9,49 51.9,47.4 53.97,45.33 JP3.4
SCL  (via drill 0.35)
  Top 0.254: MPU6050.23 25.45,47.25 26.1,47.9 v26.1,48.6 26.1,50.4 | HMC5883.1 13.56,39.92 v13.56,40 | MS5611.8 24.93,55.58 26.1,54.4 | 26.1,54.4 26.1,50.4 | R4.1 26.1,54.4 | PIC32MZ.42 26.1,50.4
  Top 0.406: JP2.2 1.93,38.63 3.99,40.69 JP17.1
  Bottom 0.254: JP17.1 8.4,40 v13.56,40 15.2,40 15.7,40.5 15.7,46.4 18.5,49.2 25.5,49.2 v26.1,48.6
SCL_J  (via drill 0.35)
  Top 0.406: U3.12 41.3,18.6 28.8,6.1 16,6.1 14.2,4.3 v8,4.3 | JP12.2 1.93,3.63 6.45,8.14 U1.1
  Bottom 0.406: v8,4.3 6.8,5.5 3.8,5.5 1.93,3.63 JP12.2
SDA  (via drill 0.35)
  Top 0.254: MS5611.7 23.77,54.33 24.87,53.23 24.87,50.1 | v14.9,41.04 15.45,40.49 HMC5883.16 | MPU6050.24 24.87,50.1 | v21,50.1 24.87,50.1 | PIC32MZ.41 27.4,50.9 v27,51.3 27,53.05 R5.1
  Bottom 0.254: v27,51.3 26.5,50.8 23.8,50.8 23.1,50.1 v21,50.1 16.66,50.1 14,47.44 14,43.26 13.97,43.23 | v14.9,41.04 14.9,42.4 14.07,43.23 13.97,43.23 | 13.97,43.23 JP17.2
  Bottom 0.406: JP2.1 4.47,40.97 6.73,43.23 JP17.2
SDA_J
  Top 0.406: U3.9 46.7,24.5 45.7,25.5 41.3,25.5 36.3,20.5 36.3,15.2 28.2,7.1 15.4,7.1 13.6,5.3 9,5.3 | 9,5.3 7.1,5.3 | 7.08,5.32 7.1,5.3 | U1.3 8.95,5.35 9,5.3 | 7.1,5.3 7.07,5.3 JP12.1
V+  (via drill 0.35)
  Top 0.406: XB2.1 5.65,26.6 C18.1 11.95,20.4 11.95,19.4 | 11.95,19.4 C15.1 11.95,18.5 | U1.4 10.6,10.66 C25.1 10.9,16.5 11.26,16.86 11.9,16.86 | 11.9,16.86 U7.5 | 11.95,18.5 11.95,16.91 11.9,16.86 | v9.6,19.4 v10.6,19.4 11.95,19.4 | v9.6,18.5 v10.6,18.5 11.95,18.5
  pour VDD (isolate 0.254, rank 2, no thermals): 0,33.5 0,0 25,0 25,33.5
VCC
  Top 0.254: HMC5883.4 13.95,37.05 13.5,37.5 13.5,38 | HMC5883.2 13.55,38.05 13.5,38 | MPU6050.13 21.65,43.7 C4.1 20.4,41.65 16.95,41.65 | C3.1 20.2,48.05 20.2,47.5 20.45,47.25 MPU6050.8 | HMC5883.13 16.95,41.65 | 13.5,38 12.7,38.8 12.7,41.2 13.95,42.45 14.55,42.45 | 14.55,42.45 C12.1 | 16.95,41.65 16.15,42.45 14.55,42.45
  Top 0.406: 19.05,49.2 C3.1 17.5,48.95 | 19.4,54.35 17.45,52.4 C14.1 17.45,49 | MS5611.1 20.07,55.58 19.4,54.9 19.4,54.35 | 19.4,54.35 19.4,54.3 20.57,54.3 MS5611.2 | C12.1 14.65,43.9 C23.1 14.65,47.39 14.7,47.45 | 17.45,48.95 17.45,49 | 17.5,48.95 17.45,49 | 17.5,48.95 15.99,47.45 14.7,47.45 | 14.7,47.45 U6.5
VDD  (via drill 0.35)
  Top 0.406: U3.17 46.65,10.05 C33.1 46.65,7.05 46.6,7 | U3.2 55.25,14.85 C27.1 57.3,15.3 | U3.3 57.15,16.7 C31.1 57.3,16.4 | 57.3,15.3 57.3,16.4 | 57.3,16.4 v58.4,16.4 | 46.25,7.05 v46.2,7 46.6,7 | 46.6,7 v47.1,7 | 57.3,15.3 v58.4,15.3
  Bottom 0.406: C19.1 27.05,21 U8.5 | 27.25,20.8 C19.1 | 27.3,19.2 v26.8,19.2 v26.8,18.3 v27.7,18.3 v27.7,19.2 27.3,19.2 | 27.3,19.2 27.35,19.25 C19.1
  pour VDD (isolate 0.254, no thermals): 25,33.5 25,0 62,0 62,33.5
XBEE_RX
  Top 0.254: R8.1 32.37,39.75 JP11.3
XBEE_RX_J  (via drill 0.35)
  Top 0.406: v22.7,5 28.5,5 29.83,3.67 JP1.2
  Bottom 0.406: XB2.3 13.1,22.6 20.4,15.3 20.4,7.3 v22.7,5
XBEE_TX
  Top 0.254: R7.1 34.4,38 34.4,37.71 JP11.4
XBEE_TX_J
  Bottom 0.406: XB2.2 14.7,24.6 22.4,16.9 22.4,7.6 JP1.1

## Text on the board
tPlace: +3.3 | RG6 | RE5 | RG7 | RG8 | GND
tNames: v5 | + | 5V | GND | SDA | SCL
bNames: 5V jumper